# EAGLE board Electronic Cricket (EAGLE 9.6.2)
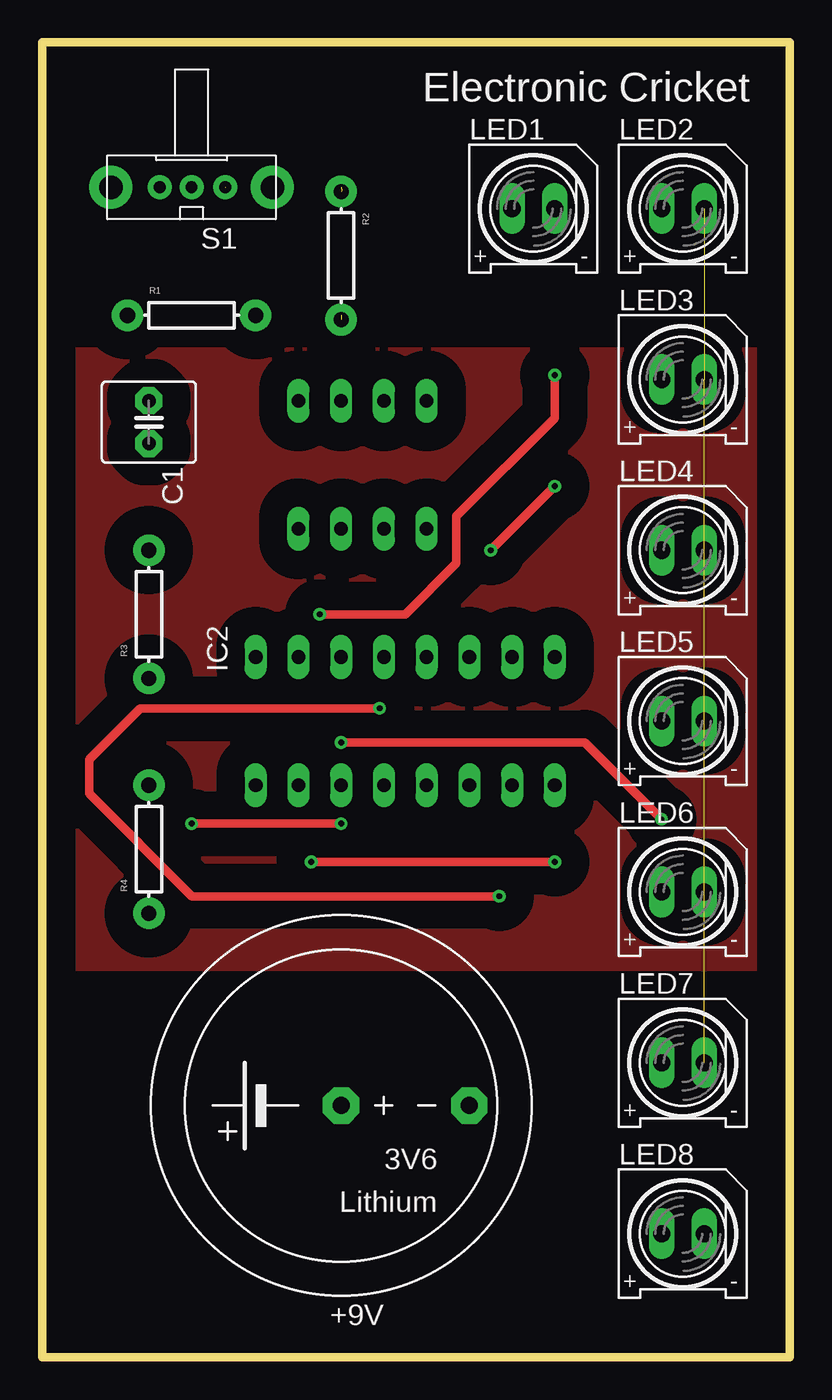
[diagram p0: board, top side]
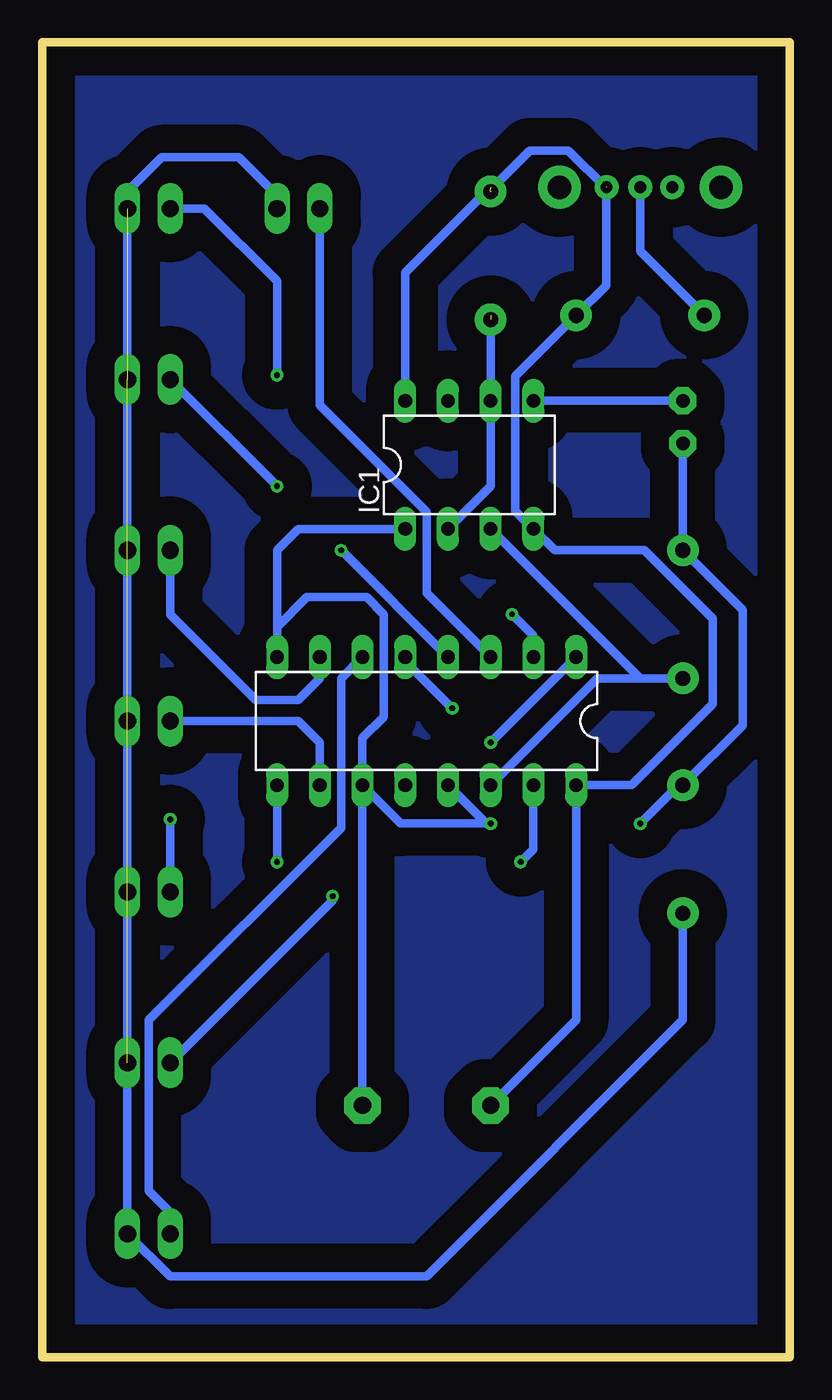
[diagram p1: board, bottom side, seen from below]

Size 44.45 x 78.23 mm. Coordinates in mm from the lower left corner, seen from the top.
Outline: 0,78.23 0,0 44.45,0 44.45,78.23 0,78.23
Copper layers (1*16): Top 0.035mm / dielectric 1.5mm / Bottom 0.035mm
Design rules "default *": minimum track width 6mil, minimum drill 0.35mm, track to track 6mil, track to pad 6mil, pad to pad 6mil, via to via 6mil, smd to smd 6mil, copper to edge 40mil, drill to drill 6mil, minimum pad ring 10mil, minimum via ring 8mil, stop-mask expansion 4mil, vias tented up to drill 0mil, thermal gap 10mil

## Footprints (pad centres in the part's own frame; a part is rotated, then mirrored left to right if it is on the bottom)
SL-340/P3.6V = drill 1.016 pad 2.159 octagon: + 0,0; - -7.62,0
C2.5-6 = drill 0.813 pad 1.6 octagon: 1 -1.27,0; 2 1.27,0
DIL-08 = drill 0.813 long: 1 -3.81,-3.81; 2 -1.27,-3.81; 3 1.27,-3.81; 4 3.81,-3.81; 5 3.81,3.81; 6 1.27,3.81; 7 -1.27,3.81; 8 -3.81,3.81
DIL16 = drill 0.813 long: 1 -8.89,-3.81; 2 -6.35,-3.81; 3 -3.81,-3.81; 4 -1.27,-3.81; 5 1.27,-3.81; 6 3.81,-3.81; 7 6.35,-3.81; 8 8.89,-3.81; 9 8.89,3.81; 10 6.35,3.81; 11 3.81,3.81; 12 1.27,3.81; 13 -1.27,3.81; 14 -3.81,3.81; 15 -6.35,3.81; 16 -8.89,3.81
Q62902-B156 = drill 1.016 long: A -1.27,0; K 1.27,0
AXIAL-0.3 = drill 0.9 pad 1.88: P$1 -3.81,0; P$2 3.81,0
EG1213 = drill 0.7 pad 1.422: 1 -2,0; 2 0,0; 3 1.9,0 | drill 1.4 pad 2.54: MT1 -4.8,0; MT2 4.8,0

## Placement (x,y rotation side)
+9V  SL340P  [SL-340/P3.6V]  17.78,14.99 180 top
C1  [C2.5-6]  6.35,55.63 270 top
IC1  NE555P  [DIL-08]  19.05,53.09 0 bottom
IC2  [DIL16]  21.59,37.85 180 bottom
LED1  [Q62902-B156]  29.21,68.33 0 top
LED2  [Q62902-B156]  38.1,68.33 0 top
LED3  [Q62902-B156]  38.1,58.17 0 top
LED4  [Q62902-B156]  38.1,48.01 0 top
LED5  [Q62902-B156]  38.1,37.85 0 top
LED6  [Q62902-B156]  38.1,27.69 0 top
LED7  [Q62902-B156]  38.1,17.53 0 top
LED8  [Q62902-B156]  38.1,7.37 0 top
R1  [AXIAL-0.3]  8.89,61.98 0 top
R2  [AXIAL-0.3]  17.78,65.53 270 top
R3  [AXIAL-0.3]  6.35,44.2 90 top
R4  [AXIAL-0.3]  6.35,30.23 90 top
S1  EG1213  [EG1213]  8.89,69.6 180 top

## Library data of the parts
+9V = battery
C1 = capacitor-wima
IC1 = SparkFun-AnalogIC; MF: Arrow Electronics; MPN: NE555N; OC_FARNELL: 1467742; OC_NEWARK: 89K1486
IC2 = ic-package
LED1-LED8 = led
R1-R4 = SparkFun-Passives
S1 = adafruit

## Nets
N$1: IC2.3 LED1.A
N$2: IC2.2 LED2.A
N$3: IC2.4 LED3.A
N$4: IC2.7 LED4.A
N$5: IC2.10 LED5.A
N$6: IC2.1 LED6.A
N$7: IC2.5 LED7.A
N$8: IC2.9 IC2.15
N$9: +9V.- C1.2 IC1.1 IC2.8 IC2.11 IC2.13 R3.P$2 R4.P$2
N$10: IC2.6 LED8.A
N$11: R1.P$1 S1.2
N$13: LED1.K LED2.K LED3.K LED4.K LED5.K LED6.K LED7.K LED8.K R4.P$1
N$14: IC1.3 IC2.14 R3.P$1
N$18: +9V.+ IC1.4 IC1.8 IC2.16 R1.P$2 R2.P$1 S1.1
N$19: IC1.2 IC1.6 R2.P$2
N$21: C1.1 IC1.5

## Tracks (layer width: path | path; a pad name or v marks a point on that pad's centre or on a via)
GND
  pour Bottom (isolate 1.676): 1.02,77.22 1.02,1.02 43.43,1.02 43.43,77.22 35.05,77.22
  pour Top (isolate 1.676): 1.78,59.94 1.78,23.11 42.67,23.11 42.67,59.94
N$1
  Bottom 0.508: IC2.3 21.59,45.47 21.59,50.29 27.94,56.64 LED1.A
N$2  (via drill 0.35)
  Top 0.508: v30.48,58.42 30.48,55.88 24.64,50.04 24.64,47.24 21.59,44.2 v16.51,44.2
  Bottom 0.508: LED2.A 34.8,68.33 30.48,64.01 v30.48,58.42 | v16.51,44.2 15.24,42.93 IC2.2
N$3  (via drill 0.35)
  Top 0.508: v26.67,48.01 v30.48,51.82
  Bottom 0.508: IC2.4 v26.67,48.01 | v30.48,51.82 LED3.A
N$4
  Bottom 0.508: IC2.7 27.94,40.39 29.21,39.12 31.75,39.12 36.83,44.2 LED4.A
N$5
  Bottom 0.508: IC2.10 27.94,36.58 29.21,37.85 LED5.A
N$6  (via drill 0.35)
  Top 0.508: v36.83,32 32.26,36.58 v17.78,36.58
  Bottom 0.508: IC2.1 v17.78,36.58 | v36.83,32 LED6.A
N$7  (via drill 0.35)
  Top 0.508: v27.18,27.43 8.89,27.43 2.79,33.53 2.79,35.56 5.84,38.61 v20.07,38.61
  Bottom 0.508: LED7.A 27.18,27.18 v27.18,27.43 | v20.07,38.61 22.86,41.4 IC2.5
N$8  (via drill 0.35)
  Top 0.508: v16,29.46 v30.48,29.46
  Bottom 0.508: IC2.15 15.24,30.23 v16,29.46 | v30.48,29.46 IC2.9
N$9  (via drill 0.35)
  Top 0.508: v8.89,31.75 v17.78,31.75
  Bottom 0.508: C1.2 R3.P$2 2.79,44.45 2.79,37.59 R4.P$2 6.6,34.04 v8.89,31.75 | 30.48,43.43 30.48,48.01 29.21,49.28 IC1.1 | +9V.- IC2.11 | 30.48,43.43 28.7,45.21 25.15,45.21 24.13,44.2 24.13,38.1 25.4,36.83 IC2.11 | 30.48,43.43 IC2.8 | IC2.13 18.03,31.75 v17.78,31.75 23.11,31.75 IC2.11
N$10
  Bottom 0.508: LED8.A 36.83,8.64 38.1,9.91 38.1,20.07 26.67,31.5 26.67,40.39 IC2.6
N$11
  Bottom 0.508: S1.2 8.89,65.79 R1.P$1
N$13  (5 unrouted)
  Bottom 0.508: R4.P$1 6.35,20.07 21.59,4.83 36.83,4.83 LED8.K LED2.K 39.37,69.34 37.34,71.37 32.77,71.37 30.48,69.09 LED1.K
N$14
  Bottom 0.508: R3.P$1 8.13,40.39 8.89,40.39 | 8.89,40.39 11.43,40.39 IC2.14 | IC1.3 8.89,40.39
N$18  (3 unrouted)
  Bottom 0.508: 10.92,69.6 10.92,69.55 | 10.92,69.55 10.92,63.75 R1.P$2 16.31,58.37 16.31,50.34 IC1.4 13.97,48.01 8.64,48.01 4.57,43.94 4.57,38.86 9.4,34.04 IC2.16 12.7,20.07 +9V.+ | 10.92,69.55 13.16,71.78 15.44,71.78 17.83,69.39 | 17.78,69.6 22.86,64.52 IC1.8
N$19  (1 unrouted)
  Bottom 0.508: 17.78,61.98 IC1.6 17.78,51.82 IC1.2
N$21
  Bottom 0.508: C1.1 IC1.5

## Text on the board
tPlace: Electronic Cricket